# Allegro board SENSOR_PLATFORM_BREAKOUT_BOARD_6KITBoards_REV02_2014-10-20.brd
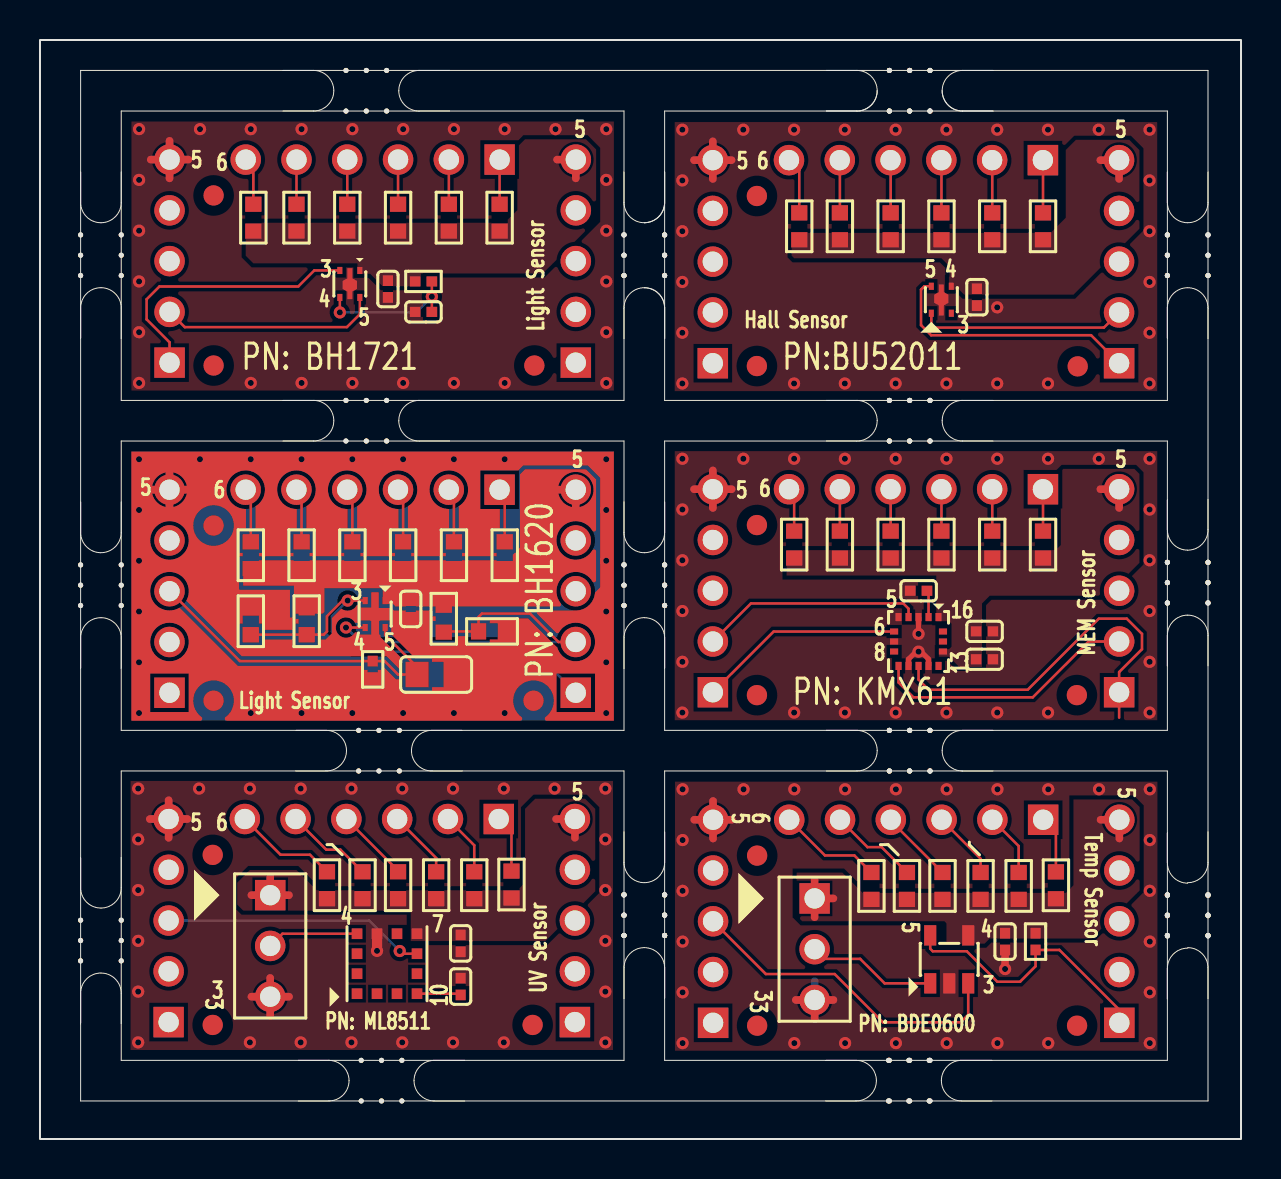
[diagram p0: board, top side]
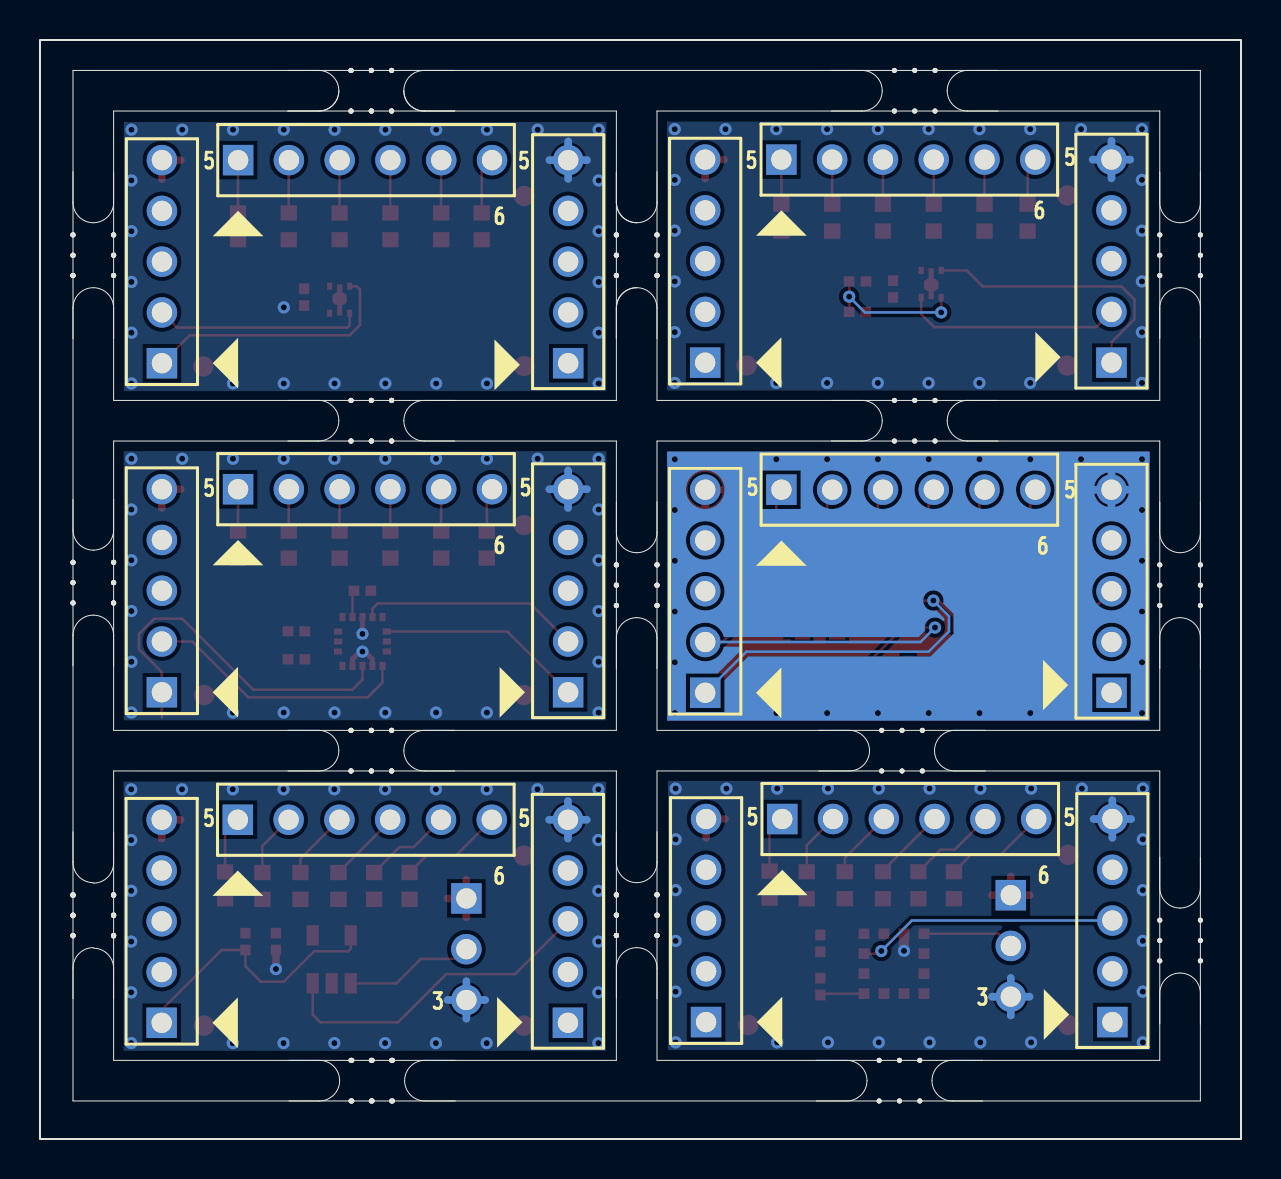
[diagram p1: board, bottom side, seen from below]

Outline 60.07 x 54.99 mm; copper layers: TOP, BOTTOM. Coordinates in mm from the lower left corner of the outline.
Outline path: rectangle 0,0 60.07,54.99 ; 2.03,53.47 2.03,1.91 58.42,1.91 58.42,53.47 2.03,53.47 ; 4.06,51.44 4.06,36.96 29.21,36.96 29.21,51.44 4.06,51.44 ; 4.06,34.92 4.06,20.45 29.21,20.45 29.21,34.92 4.06,34.92 ; 4.06,18.42 4.06,3.94 29.21,3.94 29.21,18.42 4.06,18.42 ; 31.24,51.44 31.24,36.96 56.39,36.96 56.39,51.44 31.24,51.44 ; 31.24,34.92 31.24,20.45 56.39,20.45 56.39,34.92 31.24,34.92 ; 31.24,18.42 31.24,3.94 56.39,3.94 56.39,18.42 31.24,18.42

## Design rules (mm)
net group PWR: nets GND_AL2_1 GND_AL3_1 GND_AL3_2 GND_AL4 GND_AL7 GND_HL1_1 GND_HL2_2 GND_MEM1 GND_MEM2 GND_TE1 GND_TE2_1 GND_TE3_1 GND_TE3_7 GND_UV VDD_AL2_1 VDD_AL3_1 VDD_AL3_2 VDD_AL4 VDD_AL7 VDD_HL1_1 VDD_HL2_2 VDD_MEM1 VDD_MEM2 VDD_TE1 VDD_TE2_1 VDD_TE3_1 VDD_TE3_7 VDD_UV

## Placement (name value [footprint] x y rotation side)
C6  0.1uF  [C0402]  18.54 26.52 270 top
C7  0.1uF  [C0402]  17.4 42.53 270 top
C9  1uF  [C0402]  19.18 41.39 180 top
C20  0.1uF  [C0402]  21.04 9.79 270 top
C21  1nF  [C0402]  21.04 7.63 90 top
C22  0.1uF  [C0402]  47.24 24 0 top
C23  0.1uF  [C0402]  47.24 25.4 0 top
C24  1uF  [C0402]  43.94 27.43 180 top
C35  0.1uF  [C0402]  48.27 9.88 270 top
C50  0.1uF  [C0402]  46.86 42.12 270 top
C78  22uF  [C0805]  19.81 23.24 0 top
J6  3-PIN Jumper  [HDR_THVT_1X3_100]  38.75 12.04 270 top
J7  3-PIN Jumper  [HDR_THVT_1X3_100]  11.51 12.2 270 top
NOREF  -  [unnamed]  3.05 27.71 270 top
NOREF#2  -  [unnamed]  17.08 2.92 180 top
NOREF#3  -  [unnamed]  30.23 11.2 270 top
NOREF#4  -  [unnamed]  43.5 2.92 180 top
NOREF#5  -  [unnamed#2]  8.64 14.22 90 top
NOREF#6  -  [unnamed]  30.23 27.71 270 top
NOREF#7  -  [unnamed]  43.5 52.45 180 top
NOREF#8  -  [unnamed]  57.4 27.84 270 top
NOREF#9  -  [unnamed]  3.05 44.22 270 top
NOREF#10  -  [unnamed]  57.4 27.84 270 top
NOREF#11  -  [unnamed#2]  8.68 38.7 90 top
NOREF#12  -  [unnamed#2]  35.87 14.18 90 top
NOREF#13  -  [unnamed]  43.5 35.94 180 top
NOREF#14  -  [unnamed#2]  51.9 38.66 90 top
NOREF#15  -  [unnamed#2]  35.86 30.72 90 top
NOREF#16  -  [unnamed#2]  35.86 47.18 90 top
NOREF#17  -  [unnamed#2]  51.87 5.67 90 top
NOREF#18  -  [unnamed#2]  8.68 30.7 90 top
NOREF#19  -  [unnamed#2]  35.86 38.68 90 top
NOREF#20  -  [unnamed]  43.5 19.43 180 top
NOREF#21  -  [unnamed]  57.4 11.18 90 top
NOREF#22  -  [unnamed#2]  24.73 38.7 90 top
NOREF#23  -  [unnamed]  57.4 44.22 270 top
NOREF#24  -  [unnamed]  3.05 9.93 270 top
NOREF#25  -  [unnamed#2]  51.86 22.21 90 top
NOREF#26  -  [unnamed]  57.4 44.22 270 top
NOREF#27  -  [unnamed]  43.46 2.92 180 top
NOREF#28  -  [unnamed]  57.4 11.2 270 top
NOREF#29  -  [unnamed]  16.32 52.45 180 top
NOREF#30  -  [unnamed#2]  24.64 5.71 90 top
NOREF#31  -  [unnamed#2]  35.86 22.21 90 top
NOREF#32  -  [unnamed]  43.5 19.43 180 top
NOREF#33  -  [unnamed#2]  8.68 47.21 90 top
NOREF#34  -  [unnamed]  30.23 27.71 270 top
NOREF#35  -  [unnamed#2]  24.68 21.93 90 top
NOREF#36  -  [#3]  -59.94 -250.84 0 top
NOREF#37  -  [unnamed]  16.96 19.43 180 top
NOREF#38  -  [unnamed]  57.4 11.2 270 top
NOREF#39  -  [unnamed]  30.23 44.22 270 top
NOREF#40  -  [unnamed]  43.5 35.94 180 top
NOREF#41  -  [unnamed]  16.32 35.94 180 top
NOREF#42  -  [unnamed]  30.23 44.22 270 top
NOREF#43  -  [unnamed]  30.23 11.2 270 top
NOREF#44  -  [unnamed#2]  8.64 5.71 90 top
NOREF#45  -  [unnamed]  43.5 52.45 180 top
NOREF#46  -  [#3]  13.08 -122.25 0 top
NOREF#47  -  [unnamed#2]  35.87 5.67 90 top
NOREF#48  -  [unnamed]  30.23 11.2 270 top
NOREF#49  -  [unnamed#2]  8.68 21.93 90 top
R22  1K  [R0402]  19.18 42.91 0 top
R32  10K  [R0402]  49.79 9.88 270 top
R128  0  [R0603]  10.54 25.91 90 top
R129  4.7K  [R0603]  13.34 25.91 270 top
R130  0  [R0603]  22.61 25.4 0 top
R131  4.7K  [R0603]  20.2 26.04 270 top
R132  5.6K  [R0402]  16.64 23.5 90 top
R161  0  [R0603]  50.17 45.67 90 top
R162  0  [R0603]  47.63 45.67 90 top
R163  0  [R0603]  45.09 45.67 90 top
R164  0  [R0603]  42.55 45.67 90 top
R165  0  [R0603]  40.01 45.67 90 top
R166  0  [R0603]  37.98 45.67 90 top
R167  0  [R0603]  23.24 29.21 90 top
R168  0  [R0603]  20.7 29.21 90 top
R169  0  [R0603]  18.16 29.21 90 top
R170  0  [R0603]  15.62 29.21 90 top
R171  0  [R0603]  13.08 29.21 90 top
R172  0  [R0603]  10.54 29.21 90 top
R185  0  [R0603]  22.99 46.1 90 top
R186  0  [R0603]  20.45 46.1 90 top
R187  0  [R0603]  17.91 46.1 90 top
R188  0  [R0603]  15.37 46.1 90 top
R189  0  [R0603]  12.83 46.1 90 top
R190  0  [R0603]  10.67 46.1 90 top
R197  0  [R0603]  23.58 12.73 90 top
R198  0  [R0603]  21.72 12.7 90 top
R199  0  [R0603]  19.81 12.7 90 top
R200  0  [R0603]  17.91 12.7 90 top
R201  0  [R0603]  16.13 12.7 90 top
R202  0  [R0603]  14.35 12.7 90 top
R209  0  [R0603]  50.17 29.74 90 top
R210  0  [R0603]  47.63 29.74 90 top
R211  0  [R0603]  45.09 29.74 90 top
R212  0  [R0603]  42.55 29.74 90 top
R213  0  [R0603]  40.01 29.74 90 top
R214  0  [R0603]  37.72 29.74 90 top
R233  0  [R0603]  50.81 12.7 90 top
R234  0  [R0603]  48.95 12.66 90 top
R235  0  [R0603]  47.05 12.66 90 top
R236  0  [R0603]  45.14 12.66 90 top
R237  0  [R0603]  43.36 12.66 90 top
R238  0  [R0603]  41.58 12.66 90 top
U9  SensorInterfaceHeader_1  [HDR_THVT_1X5_100]  26.8 22.33 90 bottom
U10  BH1620FVC  [WSOF5]  16.76 26.27 0 top
U11  SensorInterfaceHeader_2  [CONN_THVT_1X5_100]  6.48 22.33 90 bottom
U12  SensorInterfaceHeader_1  [HDR_THVT_1X5_100]  26.8 38.85 90 bottom
U13  BH1721FVC  [WSOF5]  15.5 42.78 0 top
U14  SensorInterfaceHeader_2  [CONN_THVT_1X5_100]  6.48 38.85 90 bottom
U16  SensorInterfaceHeader_3  [HDR_THVT_1X6_100]  22.99 32.49 180 bottom
U17  SensorInterfaceHeader_3  [HDR_THVT_1X6_100]  22.99 49.01 180 bottom
U46  SensorInterfaceHeader_2  [CONN_THVT_1X5_100]  33.67 5.81 90 bottom
U50  SensorInterfaceHeader_1  [HDR_THVT_1X5_100]  53.99 5.81 90 bottom
U51  BDE0600G  [SSOP5]  45.48 8.99 180 top
U52  SensorInterfaceHeader_3  [HDR_THVT_1X6_100]  50.18 15.97 180 bottom
U58  SensorInterfaceHeader_1  [HDR_THVT_1X5_100]  26.75 5.85 90 bottom
U59  ML8511  [TQFN12]  17.36 8.77 0 top
U60  SensorInterfaceHeader_2  [CONN_THVT_1X5_100]  6.43 5.85 90 bottom
U61  SensorInterfaceHeader_3  [HDR_THVT_1X6_100]  22.94 16.01 180 bottom
U65  SensorInterfaceHeader_1  [HDR_THVT_1X5_100]  53.98 22.35 90 bottom
U66  KMX61  [LGA_3X3X0P9]  43.94 24.89 180 top
U67  SensorInterfaceHeader_2  [CONN_THVT_1X5_100]  33.66 22.35 90 bottom
U69  SensorInterfaceHeader_3  [HDR_THVT_1X6_100]  50.17 32.51 180 bottom
U110  BU52011HFV  [HVSOF5]  45.08 41.99 180 top
U111  SensorInterfaceHeader_1  [HDR_THVT_1X5_100]  53.97 38.82 90 bottom
U112  SensorInterfaceHeader_3  [HDR_THVT_1X6_100]  50.16 48.98 180 bottom
U113  SensorInterfaceHeader_2  [CONN_THVT_1X5_100]  33.65 38.82 90 bottom

## Library data of the parts
C6 C7 C9 C20-C24 C35 C50 C78 = C_2
J6 J7 = 3-PIN Jumper
R22 R128 R130 R132 = RES_1K_1%_1/8W_0805PKG
R32 R129 R131 = RES_10K_1%_1/8W_0805PKG
R161-R172 R185-R190 R197-R202 R209-R214 R233-R238 = R
U9 U12 U50 U58 U65 U111 = SensorInterfaceHeader_1
U10 = WSOF5_1
U11 U14 U46 U60 U67 U113 = SensorInterfaceHeader_2
U13 = WSOF5_0
U16 U17 U52 U61 U69 U112 = SensorInterfaceHeader_3
U51 = HVSOF5_3
U59 = C-TQFN12-4.0x3.7-1_5.00
U66 = LGA_2.9
U110 = HVSOF5_1

## Footprints (pads in the part's own frame, mm; a bottom-side part is the same pattern mirrored in y, then rotated)
C0402
  rect 0.533x0.508 smd: 1(-0.419,0) 2(0.419,0)
C0805
  rect 1.143x1.27 smd: 1(-0.953,0) 2(0.953,0)
CONN_THVT_1X5_100
  rect 1.524x1.524 hole 1.016: 1(0,0)
  round 1.524 hole 1.016: 2(2.54,0) 3(5.08,0) 4(7.62,0) 5(10.16,0)
HDR_THVT_1X3_100
  rect 1.524x1.524 hole 1.016: 1(0,0)
  round 1.524 hole 1.016: 2(2.54,0) 3(5.08,0)
HDR_THVT_1X5_100
  rect 1.524x1.524 hole 1.016: 1(0,0)
  round 1.524 hole 1.016: 2(2.54,0) 3(5.08,0) 4(7.62,0) 5(10.16,0)
HDR_THVT_1X6_100
  rect 1.524x1.524 hole 1.016: 1(0,0)
  round 1.524 hole 1.016: 2(2.54,0) 3(5.08,0) 4(7.62,0) 5(10.16,0) 6(12.7,0)
HVSOF5
  rect 0.254x0.356 smd: 1(0.5,0.675) 3(-0.5,0.675) 4(-0.5,-0.675) 5(0.5,-0.675)
  custom 0.711x1.549 smd: 2(0,0.015)
LGA_3X3X0P9
  rect 0.305x0.406 smd: 1(-1,-1.222) 2(-0.5,-1.222) 3(0,-1.222) 4(0.5,-1.222) 5(1,-1.222) 9(1,1.222) 10(0.5,1.222) 11(0,1.222) 12(-0.5,1.222) 13(-1,1.222)
  rect 0.406x0.305 smd: 6(1.222,-0.5) 7(1.222,0) 8(1.222,0.5) 14(-1.222,0.5) 15(-1.222,0) 16(-1.222,-0.5)
R0402
  rect 0.533x0.508 smd: 1(-0.419,0) 2(0.419,0)
R0603
  rect 0.762x0.813 smd: 1(-0.673,0) 2(0.673,0)
SSOP5
  rect 0.61x1.016 smd: 1(0.95,1.2) 2(0,1.2) 3(-0.95,1.2) 4(-0.95,-1.2) 5(0.95,-1.2)
TQFN12
  rect 0.533x0.533 smd: 1(-1.5,-1.5) 2(-1.5,-0.5) 3(-1.5,0.5) 4(-1.5,1.5) 5(-0.5,1.5) 6(0.5,1.5) 7(1.5,1.5) 8(1.5,0.5) 9(1.5,-0.5) 10(1.5,-1.5) 11(0.5,-1.5) 12(-0.5,-1.5)
unnamed
  round 0.254 hole 0.508 unplated: (-1.016,1.016) (-1.016,-1.016) (0,1.016) (0,-1.016) (1.016,1.016) (1.016,-1.016)
unnamed#2
  round 1.016 smd: 1(0,0)
WSOF5
  rect 0.254x0.356 smd: 1(0.5,0.675) 3(-0.5,0.675) 4(-0.5,-0.675) 5(0.5,-0.675)
  custom 0.711x1.549 smd: 2(0,0.015)

## Nets
GND_AL2_1: C6.2 C78.2 R128.2 R130.2 R132.1 U10.2(GND) U11.5(GND)
GND_AL4: C7.2 C9.2 U13.2(GND) U14.5(GND)
GND_HL2_2: C50.2 U110.2(GND) U113.5(GND)
GND_MEM2: C22.2 C23.2 C24.2 U66.3(GND#3) U66.5(GND#5) U66.7(ADDR) U66.10(TRIG) U66.12(GND#12) U67.5(GND)
GND_TE2_1: C35.2 J6.3 U46.5(GND) U51.2(GND)
GND_UV: C20.2 C21.2 J7.3 U59.5(GND) U60.5(GND)
VDD_AL2_1: C6.1 R129.1 R131.1 R167.1 R168.1 R169.1 R170.1 R171.1 R172.1 U9.5(VDD) U10.1(VCC)
VDD_AL4: C7.1 R22.1 R185.1 R186.1 R187.1 R188.1 R189.1 R190.1 U12.5(VDD) U13.1(VCC)
VDD_HL2_2: C50.1 R161.1 R162.1 R163.1 R164.1 R165.1 R166.1 U110.4(VDD) U111.5(VDD)
VDD_MEM2: C22.1 C23.1 R209.1 R210.1 R211.1 R212.1 R213.1 R214.1 U65.5(VDD) U66.1(VDDIO) U66.14(VDD)
VDD_TE2_1: C35.1 J6.1 R32.1 R233.1 R234.1 R235.1 R236.1 R237.1 R238.1 U50.5(VDD) U51.4(VDD)
VDD_UV: C20.1 J7.1 R197.1 R198.1 R199.1 R200.1 R201.1 R202.1 U58.5(VDD) U59.7(VDD)
N389549: J7.2 U59.4(EN)
N390736: C24.1 U66.2(CAP)
N391399: U65.1(GPIO0) U66.11(INT1)
N391445: U65.2(GPIO1) U66.9(INT2)
N442989: U59.8(OUT) U60.3(ADC0)
N450158: U66.6(SDA) U67.1(SDA)
N450176: U66.4(SCL) U67.2(SCL)
N13665519: C9.1 R22.2 U13.4(DVI)
N13665743: U13.3(SDA) U14.1(SDA)
N13665759: U13.5(SCL) U14.2(SCL)
N13667842: R128.1 R129.2 U9.1(GPIO0) U10.3(GC1)
N13667854: R130.1 R131.2 U9.2(GPIO1) U10.4(GC2)
N13667882: C78.1 R132.2 U10.5(IOUT) U11.3(ADC0)
N13756973: R32.2 U50.1(GPIO0) U51.5(OS)
N13757025: U46.3(ADC0) U51.3(VTEMP)
N13757041: J6.2 U51.1(CTRL)
N13901484: U110.5(OUT1) U111.1(GPIO0)
N13901676: U110.1(OUT2) U111.2(GPIO1)
N13901780: R161.2 U112.1(SENSCTRL0)
N13901810: R162.2 U112.2(SENSCTRL1)
N13901830: R163.2 U112.3(SENSCTRL2)
N13901834: R164.2 U112.4(SENSCTRL3)
N13901838: R165.2 U112.5(SENSCTRL4)
N13901842: R166.2 U112.6(SENSCTRL5)
N13903337: R167.2 U16.1(SENSCTRL0)
N13903349: R168.2 U16.2(SENSCTRL1)
N13903369: R169.2 U16.3(SENSCTRL2)
N13903373: R170.2 U16.4(SENSCTRL3)
N13903377: R171.2 U16.5(SENSCTRL4)
N13903381: R172.2 U16.6(SENSCTRL5)
N13909909: R185.2 U17.1(SENSCTRL0)
N13909921: R186.2 U17.2(SENSCTRL1)
N13909941: R187.2 U17.3(SENSCTRL2)
N13909945: R188.2 U17.4(SENSCTRL3)
N13909949: R189.2 U17.5(SENSCTRL4)
N13909953: R190.2 U17.6(SENSCTRL5)
N13915286: R198.2 U61.2(SENSCTRL1)
N13915306: R199.2 U61.3(SENSCTRL2)
N13918167: R209.2 U69.1(SENSCTRL0)
N13918179: R210.2 U69.2(SENSCTRL1)
N13918199: R211.2 U69.3(SENSCTRL2)
N13918203: R212.2 U69.4(SENSCTRL3)
N13918207: R213.2 U69.5(SENSCTRL4)
N13918211: R214.2 U69.6(SENSCTRL5)
N13928759: R233.2 U52.1(SENSCTRL0)
N13928771: R234.2 U52.2(SENSCTRL1)
N13928791: R235.2 U52.3(SENSCTRL2)
N13928795: R236.2 U52.4(SENSCTRL3)
N13928799: R237.2 U52.5(SENSCTRL4)
N13928803: R238.2 U52.6(SENSCTRL5)
N13930681: R197.2 U61.1(SENSCTRL0)
N13930699: R200.2 U61.4(SENSCTRL3)
N13930701: R201.2 U61.5(SENSCTRL4)
N13930703: R202.2 U61.6(SENSCTRL5)
N139310850: C21.1 U59.10(TR)

Pads without a net: NOREF#5 1; NOREF#11 1; NOREF#12 1; NOREF#14 1; NOREF#15 1; NOREF#16 1; NOREF#17 1; NOREF#18 1; NOREF#19 1; NOREF#22 1; NOREF#25 1; NOREF#30 1; NOREF#31 1; NOREF#33 1; NOREF#35 1; NOREF#44 1; NOREF#47 1; NOREF#49 1; U9 3 4; U11 1 2 4; U12 1 2 3 4; U14 3 4; U46 1 2 4; U50 2 3 4; U58 1 2 3 4; U59 1 2 3 6 9 11 12; U60 1 2 4; U65 3 4; U66 8 13 15 16; U67 3 4; U110 3; U111 3 4; U113 1 2 3 4

## Via types
v1: diameter 0.61, hole 0.305, TOP to BOTTOM, 165 vias

## Routing (per net, layer and track width the routed paths; a pad name or vN(x,y) marks a point on that pad's centre or on a via; arc(x,y) is an arc through that point)
GND_AL2_1: length 7.5
  TOP w0.381: 5.54,32.49 U11.5 ; U11.5 6.48,31.55 ; U11.5 6.48,33.43 ; U11.5 7.42,32.49
  BOTTOM w0.381: 6.48,31.55 U11.5 ; U11.5 5.54,32.49 ; U11.5 6.48,33.43 ; U11.5 7.42,32.49
  vias: v1(4.95,34.01) v1(4.95,31.47) v1(4.95,28.93) v1(4.95,26.39) v1(4.95,23.85) v1(4.95,21.31) v1(8,34.01) v1(10.54,34.01) v1(10.54,21.31) v1(13.08,34.01) v1(13.08,21.31) v1(15.62,34.01) v1(15.62,21.31) v1(18.16,34.01) v1(18.16,21.31) v1(20.7,34.01) v1(20.7,21.31) v1(23.24,34.01) v1(23.24,21.31) v1(28.32,34.01) v1(28.32,31.47) v1(28.32,28.93) v1(28.32,26.39) v1(28.32,23.85) v1(28.32,21.31)
GND_AL4: length 7.5
  TOP w0.381: U14.5 7.42,49.01 ; U14.5 6.48,48.07 ; U14.5 5.54,49.01 ; U14.5 6.48,49.95
  BOTTOM w0.381: U14.5 7.42,49.01 ; U14.5 5.54,49.01 ; U14.5 6.48,48.07 ; U14.5 6.48,49.95
  vias: v1(4.96,50.53) v1(4.96,47.99) v1(4.96,45.45) v1(4.96,42.91) v1(4.96,40.37) v1(4.96,37.83) v1(8,50.53) v1(10.54,50.53) v1(10.54,37.83) v1(13.08,50.53) v1(13.08,37.83) v1(15.62,50.53) v1(15.62,37.83) v1(18.16,50.53) v1(18.16,37.83) v1(20.7,50.53) v1(20.7,37.83) v1(23.24,50.53) v1(23.24,37.83) v1(25.78,50.53) v1(28.32,50.53) v1(28.32,47.99) v1(28.32,45.45) v1(28.32,42.91) v1(28.32,40.37) v1(28.32,37.83)
GND_HL2_2: length 7.5
  TOP w0.381: 33.65,48.04 U113.5 ; U113.5 34.59,48.98 ; U113.5 33.65,49.92 ; U113.5 32.71,48.98
  BOTTOM w0.381: 32.71,48.98 U113.5 ; U113.5 33.65,48.04 ; U113.5 33.65,49.92 ; U113.5 34.59,48.98
  vias: v1(32.13,50.5) v1(32.13,47.96) v1(32.13,45.42) v1(32.13,42.88) v1(32.13,40.34) v1(32.13,37.8) v1(35.18,50.5) v1(37.72,50.5) v1(37.72,37.8) v1(40.26,50.5) v1(40.26,37.8) v1(42.8,50.5) v1(42.8,37.8) v1(45.34,50.5) v1(45.34,37.8) v1(47.88,50.5) v1(47.88,41.61) v1(47.88,37.8) v1(50.42,50.5) v1(50.42,37.8) v1(52.96,50.5) v1(55.5,50.5) v1(55.5,47.96) v1(55.5,45.42) v1(55.5,42.88) v1(55.5,40.34) v1(55.5,37.8)
GND_MEM2: length 10.4
  TOP w0.254: U66.10 43.44,24.01 43.82,24.39 v1(43.94,24.39) 44.07,24.39 44.44,24.01 U66.12 ; U66.3 v1(43.94,25.27)
  TOP w0.381: U67.5 34.59,32.51 ; U67.5 32.72,32.51 ; U67.5 33.66,33.45 ; U67.5 33.66,31.57
  BOTTOM w0.381: U67.5 33.66,33.45 ; U67.5 33.66,31.57 ; U67.5 32.72,32.51 ; U67.5 34.59,32.51
  vias: v1(32.13,34.04) v1(32.13,31.5) v1(32.13,28.96) v1(32.13,26.42) v1(32.13,23.88) v1(32.13,21.34) v1(35.18,34.04) v1(37.72,34.04) v1(37.72,21.34) v1(40.26,34.04) v1(40.26,21.34) v1(42.8,34.04) v1(42.8,21.34) v1(45.34,34.04) v1(45.34,21.34) v1(47.88,34.04) v1(47.88,21.34) v1(50.42,34.04) v1(50.42,21.34) v1(52.96,34.04) v1(55.5,34.04) v1(55.5,31.5) v1(55.5,28.96) v1(55.5,26.42) v1(55.5,23.88) v1(55.5,21.34)
GND_TE2_1: length 15.1
  TOP w0.381: 37.81,6.96 J6.3 ; J6.3 39.69,6.96 ; J6.3 38.75,6.02 ; 33.67,15.04 U46.5 ; U46.5 32.73,15.97 ; U46.5 33.67,16.91 ; U46.5 34.61,15.97 ; C35.2 v1(48.27,8.51)
  BOTTOM w0.381: 32.73,15.97 U46.5 ; U46.5 33.67,16.91 ; U46.5 34.61,15.97 ; U46.5 33.67,15.04 ; 38.75,6.02 J6.3 ; J6.3 37.81,6.96 ; J6.3 38.75,7.9 ; J6.3 39.69,6.96
  vias: v1(32.14,17.5) v1(32.14,14.96) v1(32.14,12.42) v1(32.14,9.88) v1(32.14,7.34) v1(32.14,4.8) v1(35.19,17.5) v1(37.73,17.5) v1(37.73,4.8) v1(40.27,17.5) v1(40.27,4.8) v1(42.81,17.5) v1(42.81,4.8) v1(45.35,17.5) v1(45.35,4.8) v1(47.89,17.5) v1(47.89,4.8) v1(50.43,17.5) v1(50.43,4.8) v1(52.97,17.5) v1(55.51,17.5) v1(55.51,14.96) v1(55.51,12.42) v1(55.51,9.88) v1(55.51,7.34) v1(55.51,4.8)
GND_UV: length 15.9
  TOP w0.381: J7.3 12.45,7.12 ; J7.3 11.51,6.18 ; J7.3 10.58,7.12 ; J7.3 11.51,8.06 ; 5.5,16.01 U60.5 ; U60.5 6.43,16.95 ; U60.5 6.43,15.07 ; U60.5 7.37,16.01
  TOP w0.508: U59.5 v1(16.86,9.42)
  BOTTOM w0.381: 5.5,16.01 U60.5 ; U60.5 7.37,16.01 ; U60.5 6.43,15.07 ; U60.5 6.43,16.95 ; 10.58,7.12 J7.3 ; J7.3 11.51,8.06 ; J7.3 12.45,7.12 ; J7.3 11.51,6.18
  vias: v1(4.91,17.54) v1(4.91,15) v1(4.91,12.46) v1(4.91,9.92) v1(4.91,7.38) v1(4.91,4.84) v1(7.96,17.54) v1(10.5,17.54) v1(10.5,4.84) v1(13.04,17.54) v1(13.04,4.84) v1(15.58,17.54) v1(15.58,4.84) v1(18.12,17.54) v1(18.12,4.84) v1(20.66,17.54) v1(20.66,4.84) v1(23.2,17.54) v1(23.2,4.84) v1(25.74,17.54) v1(28.28,17.54) v1(28.28,15) v1(28.28,12.46) v1(28.28,9.92) v1(28.28,7.38) v1(28.28,4.84)
VDD_AL2_1: length 1.9
  TOP w0.381: 25.86,32.49 U9.5 26.8,31.55
VDD_AL4: length 1.9
  TOP w0.381: 25.86,49.01 U12.5 26.8,48.07
VDD_HL2_2: length 1.9
  TOP w0.381: 53.03,48.98 U111.5 53.97,48.04
VDD_MEM2: length 1.9
  TOP w0.381: 53.04,32.51 U65.5 53.98,31.57
VDD_TE2_1: length 4.7
  TOP w0.381: 38.75,11.1 J6.1 ; J6.1 38.75,12.98 ; J6.1 39.69,12.04 ; 53.05,15.97 U50.5 53.99,15.04
VDD_UV: length 4.7
  TOP w0.381: J7.1 11.51,13.14 ; J7.1 10.58,12.2 ; J7.1 12.45,12.2 ; 26.75,15.07 U58.5 25.82,16.01
N389549: length 4.6
  TOP w0.127: U59.4 12.13,10.27 J7.2
N390736: length 1.3
  TOP w0.127: C24.1 44.44,27.35 U66.2
N391399: length 18.5
  TOP w0.127: U66.11 43.94,22.99 44.45,22.48 49.4,22.48 52.96,26.04 54.36,26.04 55.12,25.28 55.12,24.51 53.98,23.37 U65.1 53.98,21.08
N391445: length 13.3
  TOP w0.127: U66.9 42.94,22.84 43.69,22.1 49.66,22.1 52.45,24.89 U65.2
N442989: length 13.1
  TOP w0.127: v1(17.99,9.41) 18.13,9.27 U59.8
  BOTTOM w0.127: U60.3 16.47,10.93 v1(17.99,9.41)
N450158: length 10.3
  TOP w0.127: U67.1 36.69,25.39 U66.6
N450176: length 11.1
  TOP w0.127: U67.2 35.56,26.8 43.18,26.8 43.44,26.53 U66.4
N13665519: length 7.2
  TOP w0.127: C9.1 v1(19.6,42.15) R22.2 ; U13.4 v1(15,41.36)
  BOTTOM w0.127: v1(19.6,42.15) 18.81,41.36 v1(15,41.36)
N13665743: length 13.9
  TOP w0.127: U14.1 6.48,39.86 5.33,41.01 5.33,42.02 5.97,42.66 12.92,42.66 13.72,43.46 U13.3
N13665759: length 10.9
  TOP w0.127: U13.5 16,41.27 15.35,40.62 7.24,40.62 U14.2
N13667842: length 22.2
  TOP w0.127: U10.3 v1(15.39,26.94) 15.13,26.94 14.35,26.16 14.35,25.4 14.19,25.23 R129.2 R128.1
  BOTTOM w0.127: U9.1 24.74,24.38 15.62,24.38 14.61,25.4 14.61,26.16 v1(15.39,26.94)
N13667854: length 20.7
  TOP w0.127: R131.2 20.23,25.4 R130.1 21.94,26.12 22.1,26.29 24.51,26.29 25.93,24.87 U9.2 ; U10.4 v1(15.31,25.59)
  BOTTOM w0.127: v1(15.31,25.59) 16.03,24.87 U9.2
N13667882: length 17.1
  TOP w0.127: U10.5 17.26,25.22 18.86,23.62 C78.1 17.91,23.24 17.24,23.91 R132.2 10,23.91 6.5,27.41 U11.3
N13756973: length 13.8
  TOP w0.127: U50.1 53.99,6.46 50.99,9.46 R32.2 49.79,8.64 49.02,7.87 47.88,7.87 46.36,9.4 44.65,9.4 44.53,9.52 U51.5
N13757025: length 16.6
  TOP w0.127: U51.3 46.43,6.22 46.05,5.84 42.16,5.84 39.75,8.25 36.31,8.25 U46.3
N13757041: length 6.5
  TOP w0.127: U51.1 42.25,7.79 41.02,9.01 39.23,9.01 J6.2
N13901484: length 13.1
  TOP w0.127: U111.1 52.57,40.22 44.57,40.22 44.07,40.72 44.07,42.5 44.23,42.67 U110.5
N13901676: length 10.4
  TOP w0.127: U111.2 53.21,40.6 44.7,40.6 44.58,40.72 U110.1
N13901780: length 2.6
  TOP w0.127: U112.1 50.17,48.97 R161.2
N13901810: length 2.6
  TOP w0.127: U112.2 47.63,48.97 R162.2
N13901830: length 2.6
  TOP w0.127: R163.2 45.09,48.97 U112.3
N13901834: length 2.6
  TOP w0.127: R164.2 42.55,48.97 U112.4
N13901838: length 2.6
  TOP w0.127: R165.2 40.01,48.97 U112.5
N13901842: length 2.8
  TOP w0.127: R166.2 37.98,48.47 U112.6
N13903337: length 2.7
  TOP w0.127: R167.2 23.24,32.23 U16.1
N13903349: length 2.7
  TOP w0.127: R168.2 20.7,32.23 U16.2
N13903369: length 2.7
  TOP w0.127: R169.2 18.16,32.23 U16.3
N13903373: length 2.7
  TOP w0.127: U16.4 15.62,32.23 R170.2
N13903377: length 2.7
  TOP w0.127: R171.2 13.08,32.23 U16.5
N13903381: length 2.7
  TOP w0.127: U16.6 10.54,32.23 R172.2
N13909909: length 2.2
  TOP w0.127: U17.1 22.99,49.01 R185.2
N13909921: length 2.2
  TOP w0.127: U17.2 20.45,49.01 R186.2
N13909941: length 2.2
  TOP w0.127: R187.2 17.91,49.01 U17.3
N13909945: length 2.2
  TOP w0.127: R188.2 15.37,49.01 U17.4
N13909949: length 2.2
  TOP w0.127: U17.5 12.83,49.01 R189.2
N13909953: length 2.4
  TOP w0.127: U17.6 10.67,48.63 R190.2
N13915286: length 3.2
  TOP w0.127: R198.2 21.72,14.7 U61.2
N13915306: length 3.4
  TOP w0.127: R199.2 19.81,14.06 U61.3
N13918167: length 2.1
  TOP w0.127: U69.1 50.17,32.51 R209.2
N13918179: length 2.1
  TOP w0.127: R210.2 47.63,32.51 U69.2
N13918199: length 2.1
  TOP w0.127: U69.3 45.09,32.51 R211.2
N13918203: length 2.1
  TOP w0.127: R212.2 42.55,32.51 U69.4
N13918207: length 2.1
  TOP w0.127: U69.5 40.01,32.51 R213.2
N13918211: length 2.2
  TOP w0.127: U69.6 37.72,32.26 R214.2
N13928759: length 2.9
  TOP w0.127: R233.2 50.81,15.34 U52.1
N13928771: length 3.2
  TOP w0.127: R234.2 48.95,14.66 U52.2
N13928791: length 3.4
  TOP w0.127: U52.3 47.05,14.02 R235.2
N13928795: length 3.7
  TOP w0.127: R236.2 42.56,15.92 U52.4
N13928799: length 4.4
  TOP w0.127: U52.5 41.39,14.61 42.09,14.61 R237.2
N13928803: length 5.2
  TOP w0.127: R238.2 40.73,14.19 39.26,14.19 U52.6
N13930681: length 2.9
  TOP w0.127: U61.1 23.58,15.37 R197.2
N13930699: length 3.7
  TOP w0.127: R200.2 17.91,13.43 U61.4
N13930701: length 4.4
  TOP w0.127: U61.5 14.32,14.48 15.03,14.48 R201.2
N13930703: length 5.2
  TOP w0.127: R202.2 13.5,14.22 12.03,14.22 U61.6
N139310850: length 2.2
  TOP w0.127: C21.1 20.98,7.27 U59.10

## Copper pours and planes (outline as drawn; the poured copper is in the pictures)
GND_AL2_1 on TOP (solid shape): outline of 1168 points within 4.57,20.93 28.7,34.39
GND_AL2_1 on BOTTOM (solid shape): outline of 1031 points within 4.57,20.93 28.7,34.39
GND_AL4 on TOP: 28.71,50.91 28.71,37.45 4.58,37.45 4.58,50.91
GND_AL4 on BOTTOM: 28.71,50.91 4.58,50.91 4.58,37.45 28.71,37.45
GND_HL2_2 on TOP: 55.88,50.88 55.88,37.42 31.75,37.42 31.75,50.88 ; 1 cut-out
GND_HL2_2 on BOTTOM: 55.88,50.88 31.75,50.88 31.75,37.42 55.88,37.42
GND_MEM2 on TOP: 55.88,34.42 55.88,20.96 31.75,20.96 31.75,34.42 ; 1 cut-out
GND_MEM2 on BOTTOM: 55.88,34.42 31.75,34.42 31.75,20.96 55.88,20.96
GND_TE2_1 on TOP: 55.89,17.88 55.89,4.42 31.76,4.42 31.76,17.88
GND_TE2_1 on BOTTOM: 55.89,17.88 31.76,17.88 31.76,4.42 55.89,4.42
GND_UV on TOP: 28.66,17.92 28.66,4.45 4.53,4.45 4.53,17.92
GND_UV on BOTTOM: 28.66,17.92 4.53,17.92 4.53,4.45 28.66,4.45
VDD_AL2_1 on TOP (solid shape): outline of 249 points within 10.16,26.29 27.81,33.51
VDD_AL4 on TOP: 27.31,50.02 27.82,49.51 27.82,45.97 25.15,43.31 19.05,43.31 19.05,42.67 17.13,42.67 16.51,43.29 15.88,43.29 15.88,43.81 10.67,43.81 10.29,44.2 10.29,45.85 23.24,45.85 23.88,46.48 23.88,49.64 24.26,50.02
VDD_HL2_2 on TOP: 54.48,49.99 51.81,49.99 51.31,49.49 51.31,46.1 50.55,45.34 37.59,45.34 37.59,44.2 37.72,44.07 45.09,44.07 45.49,43.67 45.49,43.16 45.46,43.14 45.46,42.5 45.97,42.5 46.23,42.25 51.69,42.25 54.99,45.54 54.99,49.49
VDD_MEM2 on TOP: 54.74,33.53 51.18,33.53 51.06,33.4 51.06,29.72 50.8,29.46 37.34,29.46 37.34,28.19 44.83,28.19 44.83,25.91 45.47,25.91 45.59,25.78 45.59,24.64 45.47,24.51 44.96,24.51 44.96,24.13 45.47,24.13 45.97,23.62 47.12,23.62 47.12,26.8 47.5,27.18 53.34,27.18 54.99,28.83 54.99,33.28
VDD_TE2_1 on TOP: 54.62,16.99 51.69,16.99 51.69,12.7 51.31,12.32 41.15,12.32 40.13,13.33 37.85,13.33 37.85,11.17 38.12,10.89 45.24,10.89 45.34,10.79 45.34,9.78 47.24,9.78 47.5,10.03 52.59,10.03 55,12.44 55,16.61
VDD_UV on TOP: 27.26,17.03 24.77,17.03 24.26,16.52 24.26,12.83 23.88,12.45 13.85,12.45 12.83,13.46 10.5,13.46 9.86,12.83 9.86,11.73 10.16,11.43 18.54,11.43 18.54,9.91 25.28,9.91 27.77,12.39 27.77,16.52
(no net) on TOP: 27.81,27.68 26.78,26.65 17.78,26.65 17.65,26.77 17.15,26.77 17.15,27.69 17.02,27.56 14.23,27.56 14.23,26.29 12.7,26.29 12.7,27.69 10.16,27.69 10.16,28.96 23.37,28.96 24.01,29.59 24.01,33.25 24.26,33.51 27.31,33.51 27.81,33
(no net) on TOP: 28.7,34.39 28.7,20.93 4.57,20.93 4.57,34.39 ; 2 cut-outs
(no net) on BOTTOM: 28.7,34.39 4.57,34.39 4.57,20.93 28.7,20.93

## Text on the board
Ref Des/Silkscreen Top: Light Sensor | PN: ML8511 | Hall Sensor | PN: BDE0600 | UV Sensor | MEM Sensor | Temp Sensor | PN: BH1721 | PN:BU52011 | PN: KMX61 | PN: BH1620
DIMENSION: REF DETAIL "A"(33X) | RADIUS | FULL | DETAIL A | .208" | (REF) | 0 | .104" | .080" | TYP.
LOGO_OUTLINE_M: SHEET:
User.7: ASSEMBLY | SECONDARY-SIDE | 2 OF 2
User.9: 14. Rounding is allowed on 90 degree corners with the size of | 12. Inside corners should be rounded-off | 13. Changes to board geometries and apertures are not | 10. Bow and Twist | 11. Inspection | standard routing bit. | allowed unless they are approved by customer. | 4. Drilling | 5. Finish | 9. Packaging | 8. Cleanliness | 7. Electrical Test | 3. Soldermask | photoimageable soldermask, 003 max. thickness. | Soldermask over bare copper. | Soldermask is allowed in via holes. | Bow and twist to be .007 IN/IN or .090 max according to IPC-A-600D. | NOTES: | 2. Material | 6. Silkscreen | to conduct a thorough review of the artwork and media for | writing (in advance of manufacturing) of any changes, revisions,or | 1. Specifications. | as meaxured by the omega meter 600SMD. | A. All hole diameters are finished sizes. | B. All hole to be +/- .003 from true position unless otherwise specified. | C. All hole diameters to be +/- .003 unless otherwise specified. | D. An NC drill file has been supplied - see drill table. | A. Plate thru with copper .0010 min to .002 max. thickness drill size | dimension apply after plating. | B. Use gold immersion over nickel. | C. Finished boards shall not have nicks, | scratches, voids, exposed copper, poor plating, all misdrilled holes. | manufacturability in the supplier's process compliance to all | A. Boards shall be free of fiber glass dust or any other foreign material. | B. Finished boards must conform to 0.01 MG/IN max NAcL ionic contamination | A. All boards shall be 100% electrically tested for opens/short at 10 volts. | MIL-SPEC boards to be tested at 40 volts. | B. Apply test stamp in non-legend area on solder side of PCB. | C. Test is required on both sides of the board. | Solder mask both sides with (green color) liquid | A. FR4. | B. Color to be opaque. | A. Silkscreen using white non-conductive epoxy or equivalent (both sides). | B. No silkscreen allowed on exposed lands. | C. Silkscreen must be a minimum of 3mm away form fiducial marks. | D. Minimum clearance between silkscreen legend and vias, pads, or holes | to be .005. | E. Silkscreen is allowed in via holes. | There shall be a max of 25 units per package, individually wrapped, | and shipped in cardboard cratons with sufficient surrounding | material to prevend shipping damage. | A.Automatic optical inspection of all layers required. | B.The impedance should be controlled by stackup layer. | gerber and drill data when applicable. | A. Fabricate IAW  IPC600, latest revision. | B. Producibility study - It is the respondsibility  of the supplier | corrections made or recommendations to ensure conformance to | D. This drawing is to be used in conjunction with the provided | E. All notes are "Unless Otherwise Specified." | standards, and of  any specifications that  cannot be met. | applicable specifications. Customer must be advised in
User.29: L2_GND
User.30: L3_PWR
User.32: LAYER STACKING DETAIL | Total Overal Thickness: | Material Ordering Info (used in lieu of Fasttrak data) | Panel Size | Number Up | Number of Parts Due | Prepregs Construction Added? | Material Ply Specified | Material Type (ie Nelco-29, 370 HR, ...) | Layer # | Plate | 1 | 2 | Layer | Type | SIG | Copper | Weight | (Oz) | 0.5 | Thickness | (Mils) | 62.00+/-10% | 1.35 | 0.65 | Material | Type - Ply | Prepreg | Mils | Dielectric | ______ | FR4 | 58.00
User.35: FIGURE | SIZE | 12.0 | 40.0 | 20.0 | 125.0 | DRILL CHART: TOP to BOTTOM | ALL UNITS ARE IN MILS | TOLERANCE | +3.0/-10.0 | +3.0/-3.0 | +2.0/-2.0 | PLATED | NON-PLATED | QTY | 397 | 230 | 198 | 4
